# Altium PCB AT32.PcbDoc (part 8 of 9)
Units mm, origin at the board's own origin, x right, y up, seen from the top; angles counter-clockwise.
Board outline 152.1 x 84.6 mm, 2 copper layers (Top Layer, Bottom Layer); 49 components, 58 nets, 223 pads, 0 vias.
Unrouted connection lines stored in the file: 3.
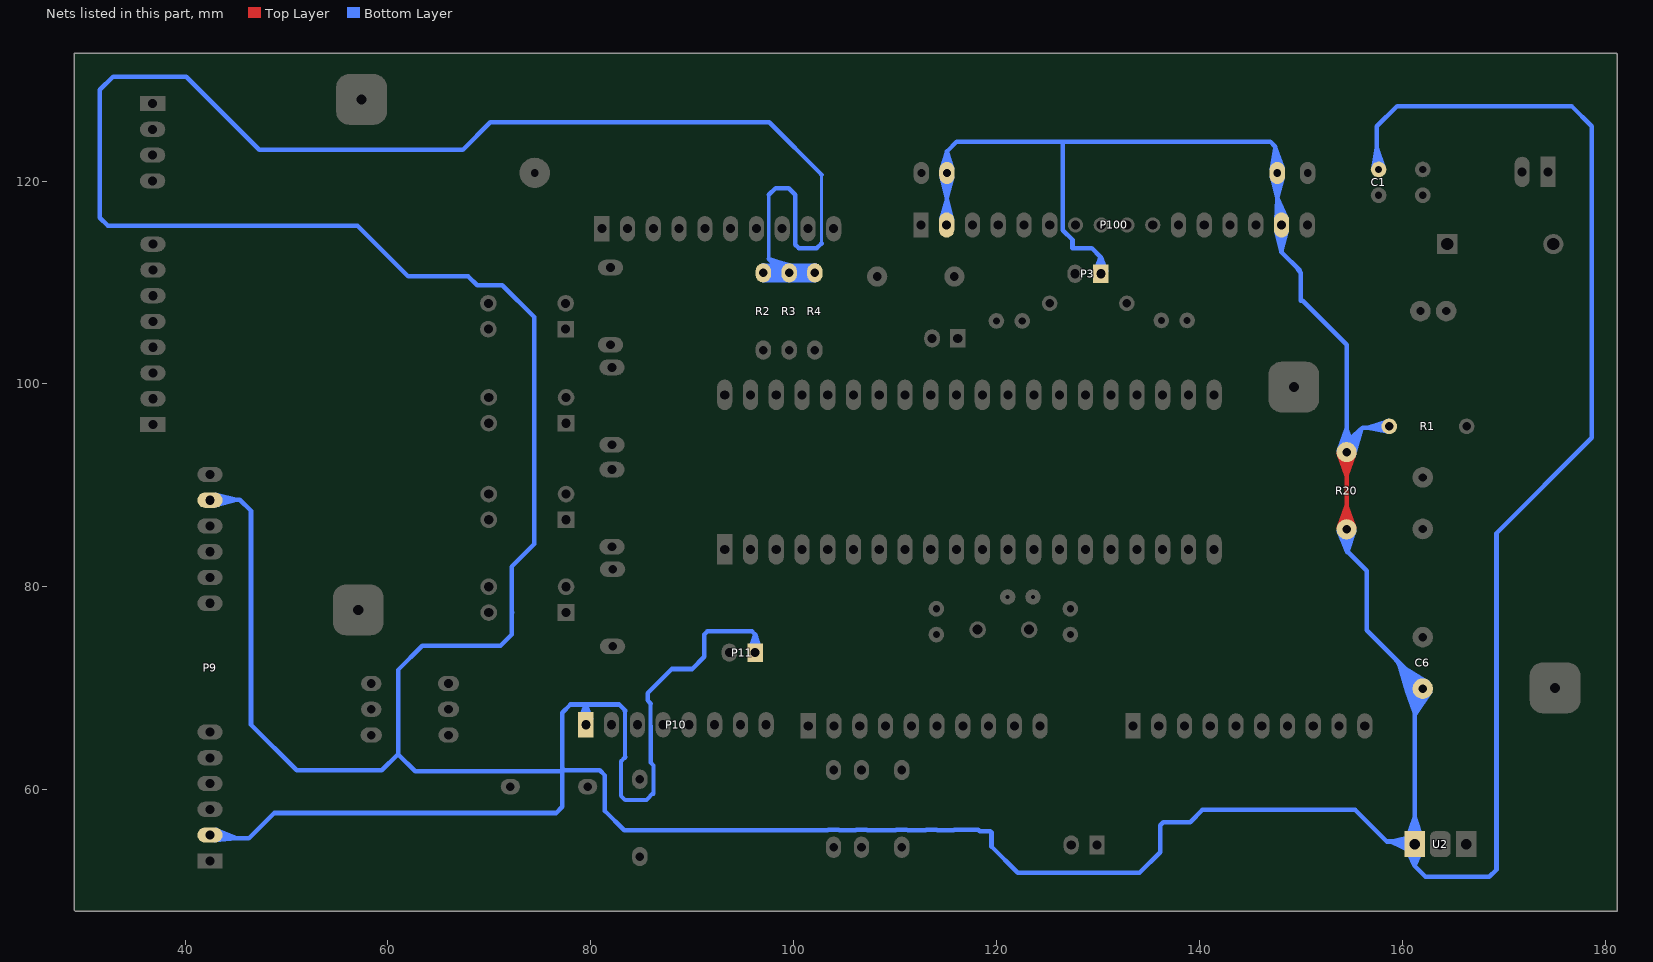
[diagram p8: the nets of this part, all layers, seen from the top]

## Nets (pads, with @x,y where several pads share a name; then routed paths per layer and width w, separated by ;. In a path a pad name is that pad's centre, name@x,y a point inside that pad or via, vN(x,y) a via of type N, cw(c..) or ccw(c..) an arc to the next point about the centre after c; other vN are vias at no path point) (continued)
VCC: C1.2 C6.1 P3.1 P9.2 P9.15 P10.1 P11.1 P100.2 P100.15 pad.1@147.697,120.8 pad.9 R1.2 R2.2 R3.2 R4.2 R20.1 R20.2 U2.3 | length 3156.3
  Top Layer w0.45: R20.1@153.971,86.213 ccw(c152.648,87.536) 154.519,87.536 ccw(c156.39,87.536) R20.1@155.067,86.213 ; R20.2@153.971,92.737 cw(c152.648,91.414) 154.519,91.414 cw(c156.39,91.414) R20.2@155.067,92.737 ; R20.1@154.519,85.579 R20.2@154.519,93.199 ; R20.1@153.755,85.793 154.519,88.015 ; R20.1@153.755,85.793 154.519,88.015 ; R20.1@153.755,85.793 154.519,88.015 ; R20.1@153.755,85.793 154.519,88.015 ; R20.1@153.755,85.793 154.519,88.015 ; R20.1@153.755,85.793 154.519,88.015 ; R20.1@153.755,85.793 154.519,88.015 ; R20.2@153.755,93.157 154.519,90.935 ; R20.2@153.755,93.157 154.519,90.935 ; R20.2@153.755,93.157 154.519,90.935 ; R20.2@153.755,93.157 154.519,90.935 ; R20.2@153.755,93.157 154.519,90.935 ; R20.2@153.755,93.157 154.519,90.935 ; R20.2@153.755,93.157 154.519,90.935 ; R20.1@154.195,85.687 154.519,88.015 ; R20.1@154.195,85.687 154.519,88.015 ; R20.1@154.195,85.687 154.519,88.015 ; R20.1@154.195,85.687 154.519,88.015 ; R20.1@154.195,85.687 154.519,88.015 ; R20.1@154.195,85.687 154.519,88.015 ; R20.1@154.195,85.687 154.519,88.015 ; R20.2@154.195,93.262 154.519,90.935 ; R20.2@154.195,93.262 154.519,90.935 ; R20.2@154.195,93.262 154.519,90.935 ; R20.2@154.195,93.262 154.519,90.935 ; R20.2@154.195,93.262 154.519,90.935 ; R20.2@154.195,93.262 154.519,90.935 ; R20.2@154.195,93.262 154.519,90.935 ; R20.1@154.519,85.665 154.519,88.015 ; R20.1@154.519,85.665 154.519,88.015 ; R20.1@154.519,85.665 154.519,88.015 ; R20.1@154.519,85.665 154.519,88.015 ; R20.1@154.519,85.665 154.519,88.015 ; R20.1@154.519,85.665 154.519,88.015 ; 154.519,88.015 R20.1@155.283,85.793 ; 154.519,88.015 R20.1@154.843,85.687 ; 154.519,88.015 R20.1@155.283,85.793 ; 154.519,88.015 R20.1@154.843,85.687 ; 154.519,88.015 R20.1@155.283,85.793 ; 154.519,88.015 R20.1@154.843,85.687 ; 154.519,88.015 R20.1@155.283,85.793 ; 154.519,88.015 R20.1@154.843,85.687 ; 154.519,88.015 R20.1@155.283,85.793 ; 154.519,88.015 R20.1@154.843,85.687 ; 154.519,88.015 R20.1@155.283,85.793 ; 154.519,88.015 R20.1@154.843,85.687 ; 154.519,88.015 R20.1@155.283,85.793 ; 154.519,88.015 R20.1@154.843,85.687 ; 154.519,90.935 R20.2@155.283,93.157 ; 154.519,90.935 R20.2@154.843,93.262 ; 154.519,90.935 R20.2@154.519,93.285 ; 154.519,90.935 R20.2@155.283,93.157 ; 154.519,90.935 R20.2@154.843,93.262 ; 154.519,90.935 R20.2@154.519,93.285 ; 154.519,90.935 R20.2@155.283,93.157 ; 154.519,90.935 R20.2@154.843,93.262 ; 154.519,90.935 R20.2@154.519,93.285 ; 154.519,90.935 R20.2@155.283,93.157 ; 154.519,90.935 R20.2@154.843,93.262 ; 154.519,90.935 R20.2@154.519,93.285 ; 154.519,90.935 R20.2@155.283,93.157 ; 154.519,90.935 R20.2@154.843,93.262 ; 154.519,90.935 R20.2@155.283,93.157 ; 154.519,90.935 R20.2@154.843,93.262 ; 154.519,90.935 R20.2@154.519,93.285 ; 154.519,90.935 R20.2@155.283,93.157 ; 154.519,90.935 R20.2@154.843,93.262 ; 154.519,90.935 R20.2@154.519,93.285
  Bottom Layer w0.33: 97.561,112.352 97.561,118.641 ; 102.751,113.851 102.751,120.649
  Bottom Layer w0.4: 83.37,63.13 83.37,67.713 ; 83.4,63.2 83,62.8 83,59.4 83.4,59 85.5,59 86.2,59.7 ; 85.91,68.51 85.91,66.299 85.915,66.294 85.915,62.685 86.2,62.4 86.2,59.6
  Bottom Layer w0.45: P9.15@42.6,88.6 45.4,88.6 46.5,87.5 46.5,66.4 51,61.9 59.4,61.9 61,63.5 ; P9.2@42.7,55.2 46.3,55.2 48.8,57.7 76.6,57.7 77.2,58.3 77.2,63.3 ; P9.2@43.013,55.573 ccw(c43.914,56.474) 43.914,55.2 ; P9.2@43.102,56.025 45.052,55.205 ; P9.2@43.331,55.891 ccw(c45,57.56) 45,55.2 ; P9.15@43.331,88.169 cw(c44.372,87.128) 44.372,88.6 ; P9.15@43.331,88.911 ccw(c44.083,89.663) 44.083,88.6 ; 72.233,77.471 72.251,77.489 ; 77.2,61.8 62.7,61.8 61,63.5 ; P10.1@79.144,67.277 ccw(c78.248,68.173) 79.515,68.173 ccw(c80.782,68.173) P10.1@79.886,67.277 ; P10.1@79.515,66.406 79.515,68.4 ; 83.37,67.713 83.375,67.718 83.375,67.825 82.8,68.4 79.515,68.4 ; 85.925,68.475 85.6,68.8 85.6,69.5 88,71.9 90,71.9 91.2,73.1 91.2,75.3 91.5,75.6 95.9,75.6 96.204,75.296 ; P11.1@95.819,74.027 ccw(c94.888,74.958) 96.204,74.958 ccw(c97.52,74.958) P11.1@96.589,74.027 ; P11.1@96.204,73.512 96.204,75.296 ; R2.2@96.954,110.236 R3.2@99.342,110.237 ; R2.2@96.955,110.235 R3.2@99.273,110.251 ; R2.2@96.965,111.68 R3.2@99.112,111.606 ; R2.2@96.985,110.233 R3.2@99.1,110.384 ; R2.2@96.989,110.233 R3.2@99.152,110.398 ; R2.2@97.007,110.232 R3.2@99.12,110.472 ; R2.2@97.016,110.357 R3.2@99.556,110.357 ; R2.2@97.021,111.682 R3.2@99.148,111.391 ; R2.2@97.034,111.502 R3.2@99.19,111.158 ; R2.2@97.046,111.681 R3.2@99.355,111.281 ; R2.2@97.05,111.681 R3.2@99.326,111.267 ; R2.2@97.06,110.234 R3.2@99.195,110.68 ; R2.2@97.076,110.415 R3.2@99.168,110.921 ; R2.2@97.083,110.844 ccw(c98.259,112.02) 98.259,110.357 ; R2.2@97.094,111.496 R3.2@99.168,110.921 ; R2.2@97.108,111.314 R3.2@99.195,110.68 ; R2.2@97.11,110.6 R3.2@99.326,111.267 ; R2.2@97.113,110.601 R3.2@99.355,111.281 ; R2.2@97.126,111.491 R3.2@99.406,110.742 ; R2.2@97.129,111.49 R3.2@99.355,110.739 ; R2.2@97.133,110.425 R3.2@99.19,111.158 ; R2.2@97.149,110.608 R3.2@99.148,111.391 ; R2.2@97.163,111.302 R3.2@99.12,110.472 ; R2.2@97.178,111.297 R3.2@99.152,110.398 ; R2.2@97.185,111.295 R3.2@99.1,110.384 ; R2.2@97.199,111.29 R3.2@99.342,110.237 ; R2.2@97.201,111.29 R3.2@99.273,110.251 ; R2.2@97.226,110.357 ccw(c97.226,113.107) R3.2@99.171,111.162 ; R2.2@97.401,111.162 ccw(c99.346,113.107) R3.2@99.346,110.357 ; 97.561,112.352 R3.2@99.556,110.357 ; 97.561,118.641 98.22,119.3 99.52,119.3 100.161,118.659 100.161,113.739 100.5,113.4 102.3,113.4 102.751,113.851 ; 97.951,111.962 ccw(c98.905,112.916) R3.2@99.369,111.649 ; 98.313,110.357 ccw(c98.313,112.02) R3.2@99.489,110.844 ; 98.45,111.463 ccw(c99.172,112.186) R3.2@99.523,111.226 ; R3.2@99.221,110.707 97.669,112.26 ; R3.2@99.365,111.287 R2.2@97.489,110.295 ; R3.2@99.37,111.289 R2.2@97.307,110.251 ; R3.2@99.375,110.623 R2.2@97.22,111.671 ; R3.2@99.375,111.291 R2.2@97.432,110.317 ; R3.2@99.387,111.295 R2.2@97.472,110.384 ; R3.2@99.394,111.297 R2.2@97.42,110.398 ; R3.2@99.411,110.612 R2.2@97.456,111.434 ; R3.2@99.417,111.304 R2.2@97.463,110.509 ; R3.2@99.42,110.609 R2.2@97.449,111.398 ; R3.2@99.424,111.306 R2.2@97.402,110.521 ; R3.2@99.434,111.488 R2.2@97.322,110.724 ; R3.2@99.436,111.489 97.442,110.76 99.536,110.412 R2.2@97.381,110.761 ; R3.2@99.44,111.489 R2.2@97.381,110.761 ; R3.2@99.441,110.424 R2.2@97.287,111.169 ; R3.2@99.443,111.49 R2.2@97.244,110.744 ; R3.2@99.444,111.49 R2.2@97.209,110.743 ; R3.2@99.444,111.49 R2.2@97.182,110.738 ; R3.2@99.449,110.423 R2.2@97.133,111.163 ; R3.2@99.456,110.601 R2.2@97.436,111.256 ; R3.2@99.458,111.313 R2.2@97.202,110.625 ; R3.2@99.463,111.314 R2.2@97.281,110.66 ; R3.2@99.464,110.6 R2.2@97.363,111.237 ; R3.2@99.466,110.6 R2.2@97.386,111.225 ; R3.2@99.478,110.418 R2.2@97.397,110.992 ; R3.2@99.484,111.497 R2.2@97.435,110.95 ; R3.2@99.488,110.416 R2.2@97.435,110.95 ; R3.2@99.494,110.236 R4.2@101.882,110.237 ; R3.2@99.495,110.235 R4.2@101.813,110.251 ; R3.2@99.496,111.499 R2.2@97.397,110.992 ; R3.2@99.505,111.68 R4.2@101.652,111.606 ; R3.2@99.509,111.68 R2.2@97.386,111.225 ; R3.2@99.513,111.68 R2.2@97.363,111.237 ; R3.2@99.516,111.681 R2.2@97.436,111.256 ; R3.2@99.519,110.233 R2.2@97.281,110.66 ; R3.2@99.525,110.233 R4.2@101.64,110.384 ; R3.2@99.526,111.681 R2.2@97.217,111.281 ; R3.2@99.528,111.681 R2.2@97.202,111.287 ; R3.2@99.534,110.412 R2.2@97.318,110.773 ; R3.2@99.538,111.502 R2.2@97.382,111.158 ; R3.2@99.538,111.502 R2.2@97.379,111.159 ; R3.2@99.542,110.412 R2.2@97.178,110.747 ; R3.2@99.546,110.412 R2.2@97.322,110.724 ; R3.2@99.547,110.232 R4.2@101.66,110.472 ; R3.2@99.552,110.232 R2.2@97.402,110.521 ; R3.2@99.553,111.682 R2.2@97.449,111.398 ; R3.2@99.555,110.232 R2.2@97.463,110.509 ; R3.2@99.561,111.682 R4.2@101.688,111.391 ; R3.2@99.562,111.682 R2.2@97.456,111.434 ; R3.2@99.574,111.502 R4.2@101.73,111.158 ; R3.2@99.583,110.233 R2.2@97.42,110.398 ; R3.2@99.586,111.681 R4.2@101.895,111.281 ; R3.2@99.587,110.233 R2.2@97.472,110.384 ; R3.2@99.59,111.681 R4.2@101.866,111.267 ; R3.2@99.6,110.234 R4.2@101.735,110.68 ; R3.2@99.607,111.68 R2.2@97.46,111.606 ; R3.2@99.608,111.68 R2.2@97.455,111.61 ; R3.2@99.611,110.235 R2.2@97.489,110.295 ; R3.2@99.611,111.679 R2.2@97.394,111.631 ; R3.2@99.613,110.235 R2.2@97.354,110.271 ; R3.2@99.616,110.415 R4.2@101.708,110.921 ; R3.2@99.616,111.679 R2.2@97.22,111.671 ; R3.2@99.618,110.236 R2.2@97.23,110.237 ; R3.2@99.618,110.236 R2.2@97.24,110.236 ; R3.2@99.623,110.844 ccw(c100.799,112.02) 100.799,110.357 ; R3.2@99.634,111.496 R4.2@101.708,110.921 ; R3.2@99.648,111.314 R4.2@101.735,110.68 ; R3.2@99.65,110.6 R4.2@101.866,111.267 ; R3.2@99.653,110.601 R4.2@101.895,111.281 ; R3.2@99.666,111.491 R4.2@101.946,110.742 ; R3.2@99.669,111.49 R4.2@101.895,110.739 ; R3.2@99.673,110.425 R4.2@101.73,111.158 ; R3.2@99.689,110.608 R4.2@101.688,111.391 ; R3.2@99.703,111.302 R4.2@101.66,110.472 ; R3.2@99.718,111.297 R4.2@101.692,110.398 ; R3.2@99.725,111.295 R4.2@101.64,110.384 ; R3.2@99.739,111.29 R4.2@101.882,110.237 ; R3.2@99.741,111.29 R4.2@101.813,110.251 ; R3.2@99.766,110.357 ccw(c99.766,113.107) R4.2@101.711,111.162 ; R3.2@99.774,111.636 97.669,112.26 ; R3.2@99.941,111.162 ccw(c101.886,113.107) R4.2@101.886,110.357 ; 100.853,110.357 ccw(c100.853,112.02) R4.2@102.029,110.844 ; R4.2@101.905,111.287 R3.2@100.029,110.295 ; R4.2@101.91,111.289 R3.2@99.847,110.251 ; R4.2@101.915,110.623 R3.2@99.76,111.671 ; R4.2@101.915,111.291 R3.2@99.972,110.317 ; R4.2@101.927,111.295 R3.2@100.012,110.384 ; R4.2@101.934,111.297 R3.2@99.96,110.398 ; R4.2@101.951,110.612 R3.2@99.996,111.434 ; R4.2@101.957,111.304 R3.2@100.003,110.509 ; R4.2@101.96,110.609 R3.2@99.989,111.398 ; R4.2@101.964,111.306 R3.2@99.942,110.521 ; R4.2@101.974,111.488 R3.2@99.862,110.724 ; R4.2@101.976,111.489 99.982,110.76 102.076,110.412 R3.2@99.921,110.761 ; R4.2@101.98,111.489 R3.2@99.921,110.761 ; R4.2@101.981,110.424 R3.2@99.827,111.169 ; R4.2@101.983,111.49 R3.2@99.784,110.744 ; R4.2@101.984,111.49 R3.2@99.749,110.743 ; R4.2@101.984,111.49 R3.2@99.722,110.738 ; R4.2@101.989,110.423 R3.2@99.673,111.163 ; R4.2@101.996,110.601 R3.2@99.976,111.256 ; R4.2@101.998,111.313 R3.2@99.742,110.625 ; R4.2@102.003,111.314 R3.2@99.821,110.66 ; R4.2@102.004,110.6 R3.2@99.903,111.237 ; R4.2@102.006,110.6 R3.2@99.926,111.225 ; R4.2@102.018,110.418 R3.2@99.937,110.992 ; R4.2@102.024,111.497 R3.2@99.975,110.95 ; R4.2@102.028,110.416 R3.2@99.975,110.95 ; R4.2@102.036,111.499 R3.2@99.937,110.992 ; R4.2@102.049,111.68 R3.2@99.926,111.225 ; R4.2@102.053,111.68 R3.2@99.903,111.237 ; R4.2@102.056,111.681 R3.2@99.976,111.256 ; R4.2@102.059,110.233 R3.2@99.821,110.66 ; R4.2@102.066,111.681 R3.2@99.757,111.281 ; R4.2@102.068,111.681 R3.2@99.742,111.287 ; R4.2@102.068,110.233 R3.2@99.742,110.625 ; R4.2@102.074,110.412 R3.2@99.858,110.773 ; R4.2@102.078,111.502 R3.2@99.922,111.158 ; R4.2@102.078,111.502 R3.2@99.919,111.159 ; R4.2@102.082,110.412 R3.2@99.718,110.747 ; R4.2@102.086,110.412 R3.2@99.862,110.724 ; R4.2@102.092,110.232 R3.2@99.942,110.521 ; R4.2@102.093,111.682 R3.2@99.989,111.398 ; R4.2@102.095,110.232 R3.2@100.003,110.509 ; R4.2@102.096,110.357 R3.2@99.556,110.357 ; R4.2@102.102,111.682 R3.2@99.996,111.434 ; R4.2@102.123,110.233 R3.2@99.96,110.398 ; R4.2@102.127,110.233 R3.2@100.012,110.384 ; R4.2@102.147,111.68 R3.2@100,111.606 ; R4.2@102.148,111.68 R3.2@99.995,111.61 ; R4.2@102.151,110.235 R3.2@100.029,110.295 ; R4.2@102.151,111.679 R3.2@99.934,111.631 ; R4.2@102.153,110.235 R3.2@99.894,110.271 ; R4.2@102.156,111.679 R3.2@99.76,111.671 ; R4.2@102.158,110.236 R3.2@99.77,110.237 ; R4.2@102.158,110.236 R3.2@99.78,110.236 ; 102.751,120.649 97.6,125.8 70.1,125.8 67.4,123.1 47.3,123.1 40.1,130.3 32.9,130.3 31.6,129 31.6,116.4 32.4,115.6 57,115.6 62,110.6 67.931,110.6 68.792,109.74 71.28,109.74 74.42,106.6 74.42,84.22 72.2,82 72.2,75.3 71.1,74.2 63.4,74.2 61,71.8 61,63.5 ; P100.2@114.721,116.547 ccw(c113.757,117.511) 115.12,117.511 ; pad.9@114.74,120.082 cw(c113.824,119.166) 115.12,119.166 cw(c116.416,119.166) pad.9@115.5,120.082 ; pad.9@114.74,121.518 ccw(c113.824,122.434) 115.12,122.434 ccw(c116.416,122.434) pad.9@115.5,121.518 ; pad.9@115,120.8 115.12,120.92 115.12,122.92 ; 115.12,117.376 ccw(c116.292,117.376) P100.2@115.463,116.547 ; pad.9@115.12,120.8 115.12,115.68 P100.2@115.2,115.6 ; 126.547,123.9 126.547,115.16 127.5,114.207 127.5,113.4 129.4,113.4 130.29,112.51 ; P3.1@129.905,111.38 ccw(c128.974,112.311) 130.29,112.311 ccw(c131.606,112.311) P3.1@130.675,111.38 ; P3.1@130.29,110.865 130.29,112.51 ; pad.1@147.161,121.156 147.501,123.246 ; pad.1@147.318,120.082 cw(c146.401,119.166) 147.697,119.166 cw(c148.994,119.166) pad.1@148.077,120.082 ; pad.1@147.318,121.518 ccw(c146.878,121.958) 147.5,121.958 ; 147.5,122.911 ccw(c149.47,122.911) pad.1@148.077,121.518 ; P100.15@147.588,116.14 147.706,118.262 ; P100.15@147.697,115.439 147.697,120.303 147.5,120.5 147.5,123.4 147,123.9 116.1,123.9 115.12,122.92 ; 147.697,117.358 ccw(c149.294,117.358) P100.15@148.165,116.229 ; 147.697,118.444 ccw(c150.38,118.444) P100.15@148.483,116.547 ; P100.15@147.741,114.805 cw(c146.874,113.938) 148.1,113.938 ; 148.1,113.88 cw(c149.408,113.88) P100.15@148.483,114.805 ; P100.15@148.1,115.8 148.1,113 149.9,111.2 ; pad.1@148.221,121.255 147.501,123.246 ; P100.15@148.611,116.339 147.706,118.262 ; 149.694,111.304 150.019,110.979 150.019,108.185 ; 150.2,108.2 154.519,103.881 R20.2@154.519,93.285 ; R20.2@153.931,93.79 155.873,95.456 ; R20.2@153.932,93.791 155.947,95.538 ; R20.2@153.935,93.794 155.872,95.426 ; R20.2@153.937,93.797 155.898,95.44 ; R20.1@153.971,85.117 cw(c152.51,83.656) 154.576,83.656 ; R20.2@153.971,93.833 ccw(c152.648,95.156) 154.519,95.156 ccw(c156.39,95.156) R20.2@155.067,93.833 ; R20.2@154.255,93.474 155.873,95.456 ; R20.2@154.257,93.477 155.898,95.44 ; R20.2@154.395,93.271 cw(c155.739,93.425) 154.782,94.382 ; 154.576,83.932 cw(c156.252,83.932) R20.1@155.067,85.117 ; R20.1@154.576,85.473 154.576,83.409 ; 154.7,83.4 156.5,81.6 156.5,75.7 161.228,70.972 C6.1@161.228,69.956 ; R20.2@154.803,93.127 155.898,95.44 ; R20.2@154.805,93.131 155.873,95.456 ; R20.2@154.842,93.322 cw(c156.921,93.561) 155.441,95.041 ; R20.2@155.227,92.969 155.947,95.538 ; R20.2@155.228,92.972 155.941,95.542 ; R20.2@155.23,92.976 155.872,95.426 ; R20.2@155.231,92.979 155.873,95.456 ; R20.2@155.289,93.374 cw(c158.103,93.697) 156.1,95.7 ; 157.136,95.7 ccw(c157.136,97.408) R1.2@158.344,96.2 ; C1.2@157.287,121.531 ccw(c156.772,122.046) 157.5,122.046 ; C1.2@157.5,121.2 157.5,125.4 159.5,127.4 176.7,127.4 178.7,125.4 178.7,94.7 169.3,85.3 169.3,52.1 168.6,51.4 162.3,51.4 161.228,52.472 ; 157.5,122.877 ccw(c159.403,122.877) C1.2@158.057,121.531 ; 157.691,95.7 cw(c157.691,94.777) R1.2@158.344,95.43 ; C1.2@158.205,121.259 157.501,123.262 C1.2@157.128,121.172 ; R1.2@158.63,96.351 156.611,95.7 R1.2@158.688,95.272 ; R1.2@158.8,95.7 156.1,95.7 ; 159.159,73.041 cw(c156.075,69.956) 160.437,69.956 ; 159.306,54.891 cw(c159.306,52.964) U2.3@160.669,54.327 ; 159.33,54.891 ccw(c159.33,56.784) 160.669,55.445 ccw(c159.318,56.796) 161.228,56.796 ccw(c163.138,56.796) U2.3@161.787,55.445 ; 159.927,72.273 cw(c157.611,69.956) 160.887,69.956 ; 160.448,69.824 161.228,67.59 ; 160.503,69.64 159.682,72.518 ; U2.3@160.669,53.818 cw(c159.327,52.472) 161.228,52.472 ; 160.669,69.397 cw(c159.318,68.046) 161.228,68.046 cw(c163.138,68.046) C6.1@161.787,69.397 ; 160.696,71.504 cw(c159.147,69.956) C6.1@161.337,69.956 ; 160.926,69.797 159.682,72.518 ; U2.3@161.16,54.891 158.485,54.891 155.376,58 140.3,58 139.1,56.8 136.429,56.8 136.139,56.51 136.139,53.839 134.1,51.8 122.1,51.8 119.509,54.391 119.509,55.8 119.396,55.913 118.364,55.913 118.214,56.063 115.824,56.063 115.761,56 114.171,56 114.116,56.055 113.084,56.055 113.029,56 111.239,56 111.176,56.063 110.144,56.063 110.081,56 107.267,56 107.204,56.063 106.172,56.063 106.109,56 104.519,56 104.456,56.063 103.424,56.063 103.361,56 83.3,56 81.4,57.9 81.4,61.4 80.9,61.9 77.4,61.9 77.18,62.12 77.18,67.58 78,68.4 79.515,68.4 ; U2.3@161.181,55.422 158.87,54.889 ; U2.3@161.237,54.738 161.228,54.747 C6.1@161.228,69.956 ; C6.1@161.246,70.076 161.228,67.345 ; C6.1@161.247,70.083 161.253,67.661 ; C6.1@161.366,69.523 160.21,72.013 ; C6.1@161.384,69.497 160.123,71.947 ; C6.1@161.396,69.48 160.001,71.989 ; C6.1@161.402,69.473 159.871,72.105 ; C6.1@161.509,70.149 159.682,72.518 ; C6.1@161.568,69.931 161.228,67.59 ; C6.1@161.696,70.035 161.228,67.345 ; C6.1@161.698,70.042 161.253,67.661 ; C6.1@161.698,70.043 161.228,67.59 ; C6.1@161.698,70.043 161.231,67.608 ; C6.1@161.738,70.692 160.888,69.931 ; C6.1@161.759,69.747 160.21,72.013 ; C6.1@161.768,69.736 160.123,71.947 ; C6.1@161.77,69.208 160.888,69.931 ; C6.1@161.773,69.73 160.001,71.989 ; C6.1@161.774,69.728 159.871,72.105 ; U2.3@161.787,53.818 ccw(c163.129,52.472) 161.228,52.472 ; C6.1@161.845,70.451 159.682,72.518 ; C6.1@161.97,70.292 160.888,69.931 ; C6.1@161.984,69.618 160.888,69.931 ; C6.1@162.008,69.824 161.228,67.59 ; C6.1@162.259,70.207 160.123,71.947 ; C6.1@162.269,70.197 160.21,72.013 ; C6.1@162.347,69.836 161.228,67.345 ; C6.1@162.506,70.586 160.001,71.989 ; C6.1@162.509,70.584 159.871,72.105 ; C6.1@162.515,70.579 160.123,71.947 ; C6.1@162.539,70.56 160.21,72.013 ; C6.1@162.726,69.584 161.253,67.661 ; C6.1@162.727,69.585 161.231,67.608 ; C6.1@162.728,69.587 161.228,67.59 ; C6.1@162.743,69.617 161.228,67.345 ; P9.2@42.946,54.995 45.083,55.2 ; P9.2@42.946,54.995 45.083,55.2 ; P9.2@42.946,54.995 45.083,55.2 ; P9.2@42.947,54.995 45.052,55.205 ; P9.2@42.946,54.995 45.083,55.2 ; P9.2@42.96,55.52 45.083,55.2 ; P9.2@42.96,55.52 45.083,55.2 ; P9.2@42.96,55.52 45.083,55.2 ; P9.2@42.96,55.52 45.052,55.205 ; P9.2@42.96,55.52 45.083,55.2 ; P9.15@42.96,88.54 45.061,88.6 ; P9.15@42.96,88.54 45.061,88.6 ; P9.15@42.96,88.54 45.061,88.6 ; P9.15@42.96,88.54 45.061,88.6 ; P9.15@42.96,88.54 45.06,88.6 ; P9.15@43.011,89.063 45.061,88.6 ; P9.15@43.011,89.063 45.061,88.6 ; P9.15@43.011,89.063 45.061,88.6 ; P9.15@43.011,89.063 45.061,88.6 ; P9.15@43.011,89.063 45.06,88.6 ; P9.15@43.04,88.021 45.061,88.6 ; P9.15@43.04,88.021 45.061,88.6 ; P9.15@43.04,88.021 45.061,88.6 ; P9.15@43.04,88.021 45.061,88.6 ; P9.15@43.04,88.021 45.06,88.6 ; P9.2@43.101,56.026 45.083,55.2 ; P9.2@43.101,56.026 45.083,55.2 ; P9.2@43.101,56.026 45.083,55.2 ; P9.2@43.101,56.026 45.083,55.2 ; P10.1@78.998,66.998 79.515,68.4 ; P10.1@78.998,66.998 79.515,68.4 ; P10.1@78.998,66.998 79.515,68.4 ; P10.1@78.998,66.998 79.515,68.4 ; P10.1@78.998,66.998 79.515,68.4 ; P10.1@79.515,66.906 79.515,68.4 ; P10.1@79.515,66.906 79.515,68.4 ; P10.1@79.515,66.906 79.515,68.4 ; P10.1@79.515,66.906 79.515,68.4 ; P10.1@79.515,66.906 79.515,68.4 ; 79.515,68.4 P10.1@80.032,66.998 ; 79.515,68.4 P10.1@80.032,66.998 ; 79.515,68.4 P10.1@80.032,66.998 ; 79.515,68.4 P10.1@80.032,66.998 ; 79.515,68.4 P10.1@80.032,66.998 ; P11.1@95.666,73.732 96.204,75.296 ; P11.1@95.666,73.732 96.204,75.296 ; P11.1@95.666,73.732 96.204,75.296 ; P11.1@95.666,73.732 96.204,75.296 ; P11.1@95.666,73.732 96.204,75.296 ; P11.1@96.204,73.642 96.204,75.296 ; P11.1@96.204,73.642 96.204,75.296 ; P11.1@96.204,73.642 96.204,75.296 ; P11.1@96.204,73.642 96.204,75.296 ; P11.1@96.204,73.642 96.204,75.296 ; 96.204,75.296 P11.1@96.742,73.732 ; 96.204,75.296 P11.1@96.742,73.732 ; 96.204,75.296 P11.1@96.742,73.732 ; 96.204,75.296 P11.1@96.742,73.732 ; 96.204,75.296 P11.1@96.742,73.732 ; R2.2@96.98,110.233 R3.2@99.242,110.357 ; R2.2@96.98,110.233 R3.2@99.242,110.357 ; R2.2@96.98,110.233 R3.2@99.242,110.357 ; R2.2@97.016,110.777 R3.2@99.242,110.357 ; R2.2@97.016,110.777 R3.2@99.242,110.357 ; R2.2@97.016,110.777 R3.2@99.242,110.357 ; R2.2@97.016,110.777 R3.2@99.1,110.384 ; R2.2@97.016,110.777 R3.2@99.273,110.251 ; R2.2@97.016,110.777 R3.2@99.342,110.237 ; R2.2@97.016,110.777 R3.2@99.12,110.472 ; R2.2@97.016,110.777 R3.2@99.152,110.398 ; R2.2@97.016,110.777 R3.2@99.195,110.68 ; R2.2@97.016,110.957 R3.2@99.355,110.739 ; R2.2@97.016,110.957 R3.2@99.406,110.742 ; R2.2@97.016,110.957 R3.2@99.168,110.921 ; R2.2@97.016,110.957 R3.2@99.19,111.158 ; R2.2@97.016,111.137 R3.2@99.326,111.267 ; R2.2@97.016,111.137 R3.2@99.355,111.281 ; R2.2@97.016,111.137 R3.2@99.148,111.391 ; R2.2@97.016,111.137 R3.2@99.112,111.606 ; R2.2@97.133,111.163 99.541,111.502 R2.2@97.287,111.169 ; R2.2@97.133,111.163 R3.2@99.556,110.957 ; R2.2@97.166,110.742 R3.2@99.543,110.412 ; R2.2@97.166,110.742 R3.2@99.446,111.491 ; R2.2@97.166,110.742 R3.2@99.556,110.957 ; R2.2@97.178,110.747 R3.2@99.446,111.491 ; R2.2@97.178,110.747 R3.2@99.556,110.957 ; R2.2@97.181,111.297 R3.2@99.242,110.357 ; R2.2@97.181,111.297 R3.2@99.242,110.357 ; R2.2@97.181,111.297 R3.2@99.242,110.357 ; R2.2@97.182,110.738 R3.2@99.544,110.412 ; R2.2@97.182,110.738 R3.2@99.556,110.957 ; R2.2@97.202,110.625 R3.2@99.112,111.606 ; R2.2@97.202,110.625 99.528,110.233 R4.2@101.692,110.398 ; R2.2@97.202,110.625 R3.2@99.556,110.777 ; R2.2@97.202,111.287 99.459,110.601 R2.2@97.217,111.281 ; R2.2@97.202,111.287 R3.2@99.556,111.137 ; R2.2@97.209,110.743 R3.2@99.542,110.412 ; R2.2@97.209,110.743 R3.2@99.556,110.957 ; R2.2@97.217,110.739 R3.2@99.543,110.412 ; R2.2@97.217,110.739 R3.2@99.443,111.49 ; R2.2@97.217,110.739 R3.2@99.556,110.957 ; R2.2@97.217,110.739 R3.2@99.543,110.412 ; R2.2@97.217,110.739 R3.2@99.443,111.49 ; R2.2@97.217,110.739 R3.2@99.556,110.957 ; R2.2@97.217,110.739 R3.2@99.543,110.412 ; R2.2@97.217,110.739 R3.2@99.443,111.49 ; R2.2@97.217,110.739 R3.2@99.556,110.957 ; R2.2@97.217,110.739 R3.2@99.543,110.412 ; R2.2@97.217,110.739 R3.2@99.443,111.49 ; R2.2@97.217,110.739 R3.2@99.556,110.957 ; R2.2@97.217,111.281 R3.2@99.556,111.137 ; R2.2@97.22,111.671 R3.2@99.556,111.137 ; R2.2@97.23,110.237 R3.2@99.373,111.29 ; R2.2@97.23,110.237 R3.2@99.556,110.777 ; R2.2@97.229,111.274 99.461,110.6 R2.2@97.235,111.273 ; R2.2@97.229,111.274 99.524,111.681 R2.2@97.235,111.273 ; R2.2@97.229,111.274 R3.2@99.556,111.137 ; R2.2@97.235,111.273 R3.2@99.556,111.137 ; R2.2@97.24,110.236 R3.2@99.372,111.29 ; R2.2@97.24,110.236 R3.2@99.556,110.777 ; R2.2@97.244,110.744 R3.2@99.542,110.412 ; R2.2@97.244,110.744 R3.2@99.556,110.957 ; R2.2@97.246,111.267 R3.2@99.462,110.6 ; R2.2@97.246,111.267 R3.2@99.522,111.681 ; R2.2@97.246,111.267 R3.2@99.556,111.137 ; R2.2@97.246,111.267 R3.2@99.462,110.6 ; R2.2@97.246,111.267 R3.2@99.522,111.681 ; R2.2@97.246,111.267 R3.2@99.556,111.137 ; R2.2@97.246,111.267 R3.2@99.462,110.6 ; R2.2@97.246,111.267 R3.2@99.522,111.681 ; R2.2@97.246,111.267 R3.2@99.556,111.137 ; R2.2@97.246,111.267 R3.2@99.462,110.6 ; R2.2@97.246,111.267 R3.2@99.522,111.681 ; R2.2@97.246,111.267 R3.2@99.556,111.137 ; R2.2@97.247,111.267 R3.2@99.461,110.6 ; R2.2@97.247,111.267 R3.2@99.522,111.681 ; R2.2@97.247,111.267 R3.2@99.556,111.137 ; R2.2@97.248,111.266 R3.2@99.462,110.6 ; R2.2@97.248,111.266 R3.2@99.522,111.681 ; R2.2@97.248,111.266 R3.2@99.556,111.137 ; R2.2@97.28,110.254 99.615,110.235 R2.2@97.307,110.257 ; R2.2@97.28,110.254 R3.2@99.373,111.29 ; R2.2@97.28,110.254 R3.2@99.556,110.777 ; R2.2@97.281,110.66 R3.2@99.556,110.777 ; R2.2@97.287,111.169 R3.2@99.556,110.957 ; R2.2@97.299,110.251 R3.2@99.616,110.235 ; R2.2@97.299,110.251 R3.2@99.371,111.29 ; R2.2@97.299,110.251 R3.2@99.556,110.777 ; R2.2@97.299,110.251 R3.2@99.616,110.235 ; R2.2@97.299,110.251 R3.2@99.371,111.29 ; R2.2@97.299,110.251 R3.2@99.556,110.777 ; R2.2@97.299,110.251 R3.2@99.616,110.235 ; R2.2@97.299,110.251 R3.2@99.371,111.29 ; R2.2@97.299,110.251 R3.2@99.556,110.777 ; R2.2@97.299,110.251 R3.2@99.616,110.235 ; R2.2@97.299,110.251 R3.2@99.371,111.29 ; R2.2@97.299,110.251 R3.2@99.556,110.777 ; R2.2@97.307,110.257 R3.2@99.371,111.29 ; R2.2@97.307,110.257 R3.2@99.556,110.777 ; R2.2@97.307,110.251 R3.2@99.617,110.235 ; R2.2@97.307,110.251 R3.2@99.556,110.777 ; R2.2@97.318,110.773 R3.2@99.446,111.491 ; R2.2@97.318,110.773 R3.2@99.556,110.957 ; R2.2@97.322,110.724 R3.2@99.556,110.957 ; R2.2@97.33,110.357 R3.2@99.592,110.233 ; R2.2@97.33,110.357 R3.2@99.391,111.297 ; R2.2@97.33,110.357 R3.2@99.556,110.777 ; R2.2@97.33,110.357 R3.2@99.592,110.233 ; R2.2@97.33,110.357 R3.2@99.391,111.297 ; R2.2@97.33,110.357 R3.2@99.556,110.777 ; R2.2@97.33,110.357 R3.2@99.592,110.233 ; R2.2@97.33,110.357 R3.2@99.391,111.297 ; R2.2@97.33,110.357 R3.2@99.556,110.777 ; R2.2@97.354,110.271 R3.2@99.371,111.29 ; R2.2@97.354,110.271 R3.2@99.556,110.777 ; R2.2@97.363,111.237 R3.2@99.556,111.137 ; R2.2@97.377,110.68 99.512,110.234 R2.2@97.377,110.681 ; R2.2@97.377,110.68 99.464,111.314 R2.2@97.377,110.681 ; R2.2@97.377,110.68 R3.2@99.556,110.777 ; R2.2@97.377,110.681 R3.2@99.556,110.777 ; R2.2@97.379,111.159 99.438,110.425 R2.2@97.382,111.158 ; R2.2@97.379,111.159 R3.2@99.556,110.957 ; R2.2@97.381,110.761 R3.2@99.556,110.957 ; R2.2@97.382,111.158 R3.2@99.556,110.957 ; R2.2@97.386,111.225 R3.2@99.556,111.137 ; R2.2@97.394,111.631 R3.2@99.37,110.625 ; R2.2@97.394,111.631 R3.2@99.556,111.137 ; R2.2@97.397,110.992 R3.2@99.556,110.957 ; R2.2@97.402,110.521 R3.2@99.556,110.777 ; R2.2@97.404,110.921 99.496,110.415 R2.2@97.408,110.922 ; R2.2@97.404,110.921 99.478,111.496 R2.2@97.408,110.922 ; R2.2@97.404,110.921 R3.2@99.556,110.957 ; R2.2@97.408,110.922 R3.2@99.556,110.957 ; R2.2@97.42,110.398 R3.2@99.556,110.777 ; R2.2@97.424,111.391 99.423,110.608 R2.2@97.43,111.391 ; R2.2@97.424,111.391 99.551,111.682 R2.2@97.43,111.391 ; R2.2@97.424,111.391 R3.2@99.556,111.137 ; R2.2@97.43,111.391 R3.2@99.556,111.137 ; R2.2@97.432,110.317 99.604,110.234 R2.2@97.47,110.32 ; R2.2@97.432,110.317 R3.2@99.556,110.777 ; R2.2@97.435,110.95 R3.2@99.556,110.957 ; R2.2@97.436,111.256 R3.2@99.556,111.137 ; R2.2@97.449,111.398 R3.2@99.556,111.137 ; R2.2@97.453,110.471 99.565,110.232 R2.2@97.452,110.472 ; R2.2@97.453,110.471 99.409,111.302 R2.2@97.452,110.472 ; R2.2@97.453,110.471 R3.2@99.556,110.777 ; R2.2@97.452,110.472 R3.2@99.556,110.777 ; R2.2@97.455,111.61 R3.2@99.37,110.625 ; R2.2@97.455,111.61 R3.2@99.556,111.137 ; R2.2@97.456,111.434 R3.2@99.556,111.137 ; R2.2@97.46,111.606 R3.2@99.37,110.625 ; R2.2@97.46,111.606 R3.2@99.556,111.137 ; R2.2@97.463,110.509 R3.2@99.556,110.777 ; R2.2@97.47,110.32 R3.2@99.372,111.29 ; R2.2@97.47,110.32 R3.2@99.556,110.777 ; R2.2@97.472,110.384 R3.2@99.556,110.777 ; R2.2@97.489,110.295 R3.2@99.556,110.777 ; 97.63,112.283 R3.2@99.222,110.706 ; 97.63,112.283 R3.2@99.776,111.636 ; 97.63,112.283 R3.2@99.556,111.137 ; 97.63,112.283 R3.2@99.222,110.706 ; 97.63,112.283 R3.2@99.776,111.636 ; 97.63,112.283 R3.2@99.556,111.137 ; 97.63,112.283 R3.2@99.222,110.706 ; 97.63,112.283 R3.2@99.776,111.636 ; 97.63,112.283 R3.2@99.556,111.137 ; 97.63,112.283 R3.2@99.222,110.706 ; 97.63,112.283 R3.2@99.776,111.636 ; 97.63,112.283 R3.2@99.556,111.137 ; 97.669,112.26 R3.2@99.556,111.137 ; R3.2@99.355,110.739 97.029,110.412 R3.2@99.406,110.742 ; R3.2@99.52,110.233 R4.2@101.782,110.357 ; R3.2@99.52,110.233 R4.2@101.782,110.357 ; R3.2@99.52,110.233 R4.2@101.782,110.357 ; R3.2@99.556,110.777 R4.2@101.782,110.357 ; R3.2@99.556,110.777 R4.2@101.782,110.357 ; R3.2@99.556,110.777 R4.2@101.782,110.357 ; R3.2@99.556,110.777 R4.2@101.64,110.384 ; R3.2@99.556,110.777 R4.2@101.813,110.251 ; R3.2@99.556,110.777 R4.2@101.882,110.237 ; R3.2@99.556,110.777 R4.2@101.66,110.472 ; R3.2@99.556,110.777 R4.2@101.692,110.398 ; R3.2@99.556,110.777 R4.2@101.735,110.68 ; R3.2@99.556,110.957 R4.2@101.895,110.739 ; R3.2@99.556,110.957 R4.2@101.946,110.742 ; R3.2@99.556,110.957 R4.2@101.708,110.921 ; R3.2@99.556,110.957 R4.2@101.73,111.158 ; R3.2@99.556,111.137 R4.2@101.866,111.267 ; R3.2@99.556,111.137 R4.2@101.895,111.281 ; R3.2@99.556,111.137 R4.2@101.688,111.391 ; R3.2@99.556,111.137 R4.2@101.652,111.606 ; R3.2@99.673,111.163 102.081,111.502 R3.2@99.827,111.169 ; R3.2@99.673,111.163 R4.2@102.096,110.957 ; R3.2@99.706,110.742 R4.2@102.083,110.412 ; R3.2@99.706,110.742 R4.2@101.986,111.491 ; R3.2@99.706,110.742 R4.2@102.096,110.957 ; R3.2@99.718,110.747 R4.2@101.986,111.491 ; R3.2@99.718,110.747 R4.2@102.096,110.957 ; R3.2@99.721,111.297 R4.2@101.782,110.357 ; R3.2@99.721,111.297 R4.2@101.782,110.357 ; R3.2@99.721,111.297 R4.2@101.782,110.357 ; R3.2@99.722,110.738 R4.2@102.084,110.412 ; R3.2@99.722,110.738 R4.2@102.096,110.957 ; R3.2@99.742,110.625 R4.2@101.652,111.606 ; R3.2@99.742,110.625 R4.2@102.096,110.777 ; R3.2@99.742,111.287 101.999,110.601 R3.2@99.757,111.281 ; R3.2@99.742,111.287 R4.2@102.096,111.137 ; R3.2@99.749,110.743 R4.2@102.082,110.412 ; R3.2@99.749,110.743 R4.2@102.096,110.957 ; R3.2@99.757,110.739 R4.2@102.083,110.412 ; R3.2@99.757,110.739 R4.2@101.983,111.49 ; R3.2@99.757,110.739 R4.2@102.096,110.957 ; R3.2@99.757,110.739 R4.2@102.083,110.412 ; R3.2@99.757,110.739 R4.2@101.983,111.49 ; R3.2@99.757,110.739 R4.2@102.096,110.957 ; R3.2@99.757,110.739 R4.2@102.083,110.412 ; R3.2@99.757,110.739 R4.2@101.983,111.49 ; R3.2@99.757,110.739 R4.2@102.096,110.957 ; R3.2@99.757,110.739 R4.2@102.083,110.412 ; R3.2@99.757,110.739 R4.2@101.983,111.49 ; R3.2@99.757,110.739 R4.2@102.096,110.957 ; R3.2@99.757,111.281 R4.2@102.096,111.137 ; R3.2@99.76,111.671 R4.2@102.096,111.137 ; R3.2@99.77,110.237 R4.2@101.913,111.29 ; R3.2@99.77,110.237 R4.2@102.096,110.777 ; R3.2@99.769,111.274 102.001,110.6 R3.2@99.775,111.273 ; R3.2@99.769,111.274 102.064,111.681 R3.2@99.775,111.273 ; R3.2@99.769,111.274 R4.2@102.096,111.137 ; R3.2@99.775,111.273 R4.2@102.096,111.137 ; R3.2@99.78,110.236 R4.2@101.912,111.29 ; R3.2@99.78,110.236 R4.2@102.096,110.777 ; R3.2@99.784,110.744 R4.2@102.082,110.412 ; R3.2@99.784,110.744 R4.2@102.096,110.957 ; R3.2@99.786,111.267 R4.2@102.002,110.6 ; R3.2@99.786,111.267 R4.2@102.062,111.681 ; R3.2@99.786,111.267 R4.2@102.096,111.137 ; R3.2@99.786,111.267 R4.2@102.002,110.6 ; R3.2@99.786,111.267 R4.2@102.062,111.681 ; R3.2@99.786,111.267 R4.2@102.096,111.137 ; R3.2@99.786,111.267 R4.2@102.002,110.6 ; R3.2@99.786,111.267 R4.2@102.062,111.681 ; R3.2@99.786,111.267 R4.2@102.096,111.137 ; R3.2@99.786,111.267 R4.2@102.002,110.6 ; R3.2@99.786,111.267 R4.2@102.062,111.681 ; R3.2@99.786,111.267 R4.2@102.096,111.137 ; R3.2@99.787,111.267 R4.2@102.001,110.6 ; R3.2@99.787,111.267 R4.2@102.062,111.681 ; R3.2@99.787,111.267 R4.2@102.096,111.137 ; R3.2@99.788,111.266 R4.2@102.002,110.6 ; R3.2@99.788,111.266 R4.2@102.062,111.681 ; R3.2@99.788,111.266 R4.2@102.096,111.137 ; R3.2@99.82,110.254 102.155,110.235 R3.2@99.847,110.257 ; R3.2@99.82,110.254 R4.2@101.913,111.29 ; R3.2@99.82,110.254 R4.2@102.096,110.777 ; R3.2@99.821,110.66 R4.2@102.096,110.777 ; R3.2@99.827,111.169 R4.2@102.096,110.957 ; R3.2@99.839,110.251 R4.2@102.156,110.235 ; R3.2@99.839,110.251 R4.2@101.911,111.29 ; R3.2@99.839,110.251 R4.2@102.096,110.777 ; R3.2@99.839,110.251 R4.2@102.156,110.235 ; R3.2@99.839,110.251 R4.2@101.911,111.29 ; R3.2@99.839,110.251 R4.2@102.096,110.777 ; R3.2@99.839,110.251 R4.2@102.156,110.235 ; R3.2@99.839,110.251 R4.2@101.911,111.29 ; R3.2@99.839,110.251 R4.2@102.096,110.777 ; R3.2@99.839,110.251 R4.2@102.156,110.235 ; R3.2@99.839,110.251 R4.2@101.911,111.29 ; R3.2@99.839,110.251 R4.2@102.096,110.777 ; R3.2@99.847,110.257 R4.2@101.911,111.29 ; R3.2@99.847,110.257 R4.2@102.096,110.777 ; R3.2@99.847,110.251 R4.2@102.157,110.235 ; R3.2@99.847,110.251 R4.2@102.096,110.777 ; R3.2@99.858,110.773 R4.2@101.986,111.491 ; R3.2@99.858,110.773 R4.2@102.096,110.957 ; R3.2@99.862,110.724 R4.2@102.096,110.957 ; R3.2@99.87,110.357 R4.2@102.132,110.233 ; R3.2@99.87,110.357 R4.2@101.931,111.297 ; R3.2@99.87,110.357 R4.2@102.096,110.777 ; R3.2@99.87,110.357 R4.2@102.132,110.233 ; R3.2@99.87,110.357 R4.2@101.931,111.297 ; R3.2@99.87,110.357 R4.2@102.096,110.777 ; R3.2@99.87,110.357 R4.2@102.132,110.233 ; R3.2@99.87,110.357 R4.2@101.931,111.297 ; R3.2@99.87,110.357 R4.2@102.096,110.777 ; R3.2@99.894,110.271 R4.2@101.911,111.29 ; R3.2@99.894,110.271 R4.2@102.096,110.777 ; R3.2@99.903,111.237 R4.2@102.096,111.137 ; R3.2@99.917,110.68 102.052,110.234 R3.2@99.917,110.681 ; R3.2@99.917,110.68 102.004,111.314 R3.2@99.917,110.681 ; R3.2@99.917,110.68 R4.2@102.096,110.777 ; R3.2@99.917,110.681 R4.2@102.096,110.777 ; R3.2@99.919,111.159 101.978,110.425 R3.2@99.922,111.158 ; R3.2@99.919,111.159 R4.2@102.096,110.957 ; R3.2@99.921,110.761 R4.2@102.096,110.957 ; R3.2@99.922,111.158 R4.2@102.096,110.957 ; R3.2@99.926,111.225 R4.2@102.096,111.137 ; R3.2@99.934,111.631 R4.2@101.91,110.625 ; R3.2@99.934,111.631 R4.2@102.096,111.137 ; R3.2@99.937,110.992 R4.2@102.096,110.957 ; R3.2@99.942,110.521 R4.2@102.096,110.777 ; R3.2@99.944,110.921 102.036,110.415 R3.2@99.948,110.922 ; R3.2@99.944,110.921 102.018,111.496 R3.2@99.948,110.922 ; R3.2@99.944,110.921 R4.2@102.096,110.957 ; R3.2@99.948,110.922 R4.2@102.096,110.957 ; R3.2@99.96,110.398 R4.2@102.096,110.777 ; R3.2@99.964,111.391 101.963,110.608 R3.2@99.97,111.391 ; R3.2@99.964,111.391 102.091,111.682 R3.2@99.97,111.391 ; R3.2@99.964,111.391 R4.2@102.096,111.137 ; R3.2@99.97,111.391 R4.2@102.096,111.137 ; R3.2@99.972,110.317 102.144,110.234 R3.2@100.01,110.32 ; R3.2@99.972,110.317 R4.2@102.096,110.777 ; R3.2@99.975,110.95 R4.2@102.096,110.957 ; R3.2@99.976,111.256 R4.2@102.096,111.137 ; R3.2@99.989,111.398 R4.2@102.096,111.137 ; R3.2@99.993,110.471 102.105,110.232 R3.2@99.992,110.472 ; R3.2@99.993,110.471 101.949,111.302 R3.2@99.992,110.472 ; R3.2@99.993,110.471 R4.2@102.096,110.777 ; R3.2@99.992,110.472 R4.2@102.096,110.777 ; R3.2@99.995,111.61 R4.2@101.91,110.625 ; R3.2@99.995,111.61 R4.2@102.096,111.137 ; R3.2@99.996,111.434 R4.2@102.096,111.137 ; R3.2@100,111.606 R4.2@101.91,110.625 ; R3.2@100,111.606 R4.2@102.096,111.137 ; R3.2@100.003,110.509 R4.2@102.096,110.777 ; R3.2@100.01,110.32 R4.2@101.912,111.29 ; R3.2@100.01,110.32 R4.2@102.096,110.777 ; R3.2@100.012,110.384 R4.2@102.096,110.777 ; R3.2@100.029,110.295 R4.2@102.096,110.777 ; R4.2@101.895,110.739 99.569,110.412 R4.2@101.946,110.742 ; P100.2@114.572,116.249 115.12,118.276 ; P100.2@114.572,116.249 115.12,118.276 ; P100.2@114.572,116.249 115.12,118.276 ; P100.2@114.572,116.249 115.12,118.276 ; P100.2@114.572,116.249 115.12,118.276 ; pad.9@114.587,120.394 115.12,118.35 ; pad.9@114.587,120.394 115.12,118.35 ; pad.9@114.587,120.394 115.12,118.35 ; pad.9@114.587,120.394 115.12,118.35 ; pad.9@114.587,120.394 115.12,118.35 ; pad.9@114.589,121.219 115.12,122.92 ; pad.9@114.589,121.219 115.12,122.92 ; pad.9@114.589,121.219 115.12,122.92 ; pad.9@114.589,121.219 115.12,122.92 ; pad.9@114.589,121.219 115.12,122.92 ; P100.2@115.092,116.176 115.12,118.276 ; P100.2@115.092,116.176 115.12,118.276 ; P100.2@115.092,116.176 115.12,118.276 ; P100.2@115.092,116.176 115.12,118.276 ; P100.2@115.092,116.176 115.12,118.276 ; 115.12,118.276 P100.2@115.614,116.235 ; 115.12,118.276 P100.2@115.614,116.235 ; 115.12,118.276 P100.2@115.614,116.235 ; 115.12,118.276 P100.2@115.614,116.235 ; 115.12,118.276 P100.2@115.614,116.235 ; 115.12,118.35 pad.9@115.653,120.394 ; 115.12,118.35 pad.9@115.12,120.462 ; 115.12,118.35 pad.9@115.653,120.394 ; 115.12,118.35 pad.9@115.12,120.462 ; 115.12,118.35 pad.9@115.653,120.394 ; 115.12,118.35 pad.9@115.12,120.462 ; 115.12,118.35 pad.9@115.653,120.394 ; 115.12,118.35 pad.9@115.12,120.462 ; 115.12,118.35 pad.9@115.653,120.394 ; 115.12,118.35 pad.9@115.12,120.462 ; pad.9@115.12,121.138 115.12,122.92 ; pad.9@115.12,121.138 115.12,122.92 ; pad.9@115.12,121.138 115.12,122.92 ; pad.9@115.12,121.138 115.12,122.92 ; pad.9@115.12,121.138 115.12,122.92 ; 115.12,122.92 pad.9@115.651,121.219 ; 115.12,122.92 pad.9@115.651,121.219 ; 115.12,122.92 pad.9@115.651,121.219 ; 115.12,122.92 pad.9@115.651,121.219 ; 115.12,122.92 pad.9@115.651,121.219 ; P3.1@129.754,111.093 130.29,112.51 ; P3.1@129.754,111.093 130.29,112.51 ; P3.1@129.754,111.093 130.29,112.51 ; P3.1@129.754,111.093 130.29,112.51 ; P3.1@129.754,111.093 130.29,112.51 ; P3.1@130.29,110.995 130.29,112.51 ; P3.1@130.29,110.995 130.29,112.51 ; P3.1@130.29,110.995 130.29,112.51 ; P3.1@130.29,110.995 130.29,112.51 ; P3.1@130.29,110.995 130.29,112.51 ; 130.29,112.51 P3.1@130.826,111.093 ; 130.29,112.51 P3.1@130.826,111.093 ; 130.29,112.51 P3.1@130.826,111.093 ; 130.29,112.51 P3.1@130.826,111.093 ; 130.29,112.51 P3.1@130.826,111.093 ; pad.1@147.161,121.156 147.5,123.255 ; pad.1@147.161,121.156 147.5,123.255 ; pad.1@147.161,121.156 147.5,123.255 ; pad.1@147.161,121.156 147.5,123.255 ; pad.1@147.165,120.394 147.697,118.35 ; pad.1@147.165,120.394 147.697,118.35 ; pad.1@147.165,120.394 147.697,118.35 ; pad.1@147.165,120.394 147.697,118.35 ; pad.1@147.165,120.394 147.697,118.35 ; 147.501,123.246 pad.1@147.697,121.138 ; 147.5,123.255 pad.1@148.222,121.255 ; 147.5,123.255 pad.1@147.697,121.138 ; 147.5,123.255 pad.1@148.222,121.255 ; 147.5,123.255 pad.1@147.697,121.138 ; 147.5,123.255 pad.1@148.222,121.255 ; 147.5,123.255 pad.1@147.697,121.138 ; 147.5,123.255 pad.1@148.222,121.255 ; 147.5,123.255 pad.1@147.697,121.138 ; P100.15@147.588,116.139 147.697,118.306 ; P100.15@147.588,116.139 147.697,118.306 ; P100.15@147.588,116.139 147.697,118.306 ; P100.15@147.588,116.139 147.697,118.306 ; P100.15@147.591,115.113 148.1,113.076 ; P100.15@147.591,115.113 148.1,113.076 ; P100.15@147.591,115.113 148.1,113.076 ; P100.15@147.591,115.113 148.1,113.076 ; P100.15@147.591,115.113 148.1,113.076 ; 147.697,118.306 P100.15@148.611,116.338 ; 147.697,118.306 P100.15@148.112,116.176 ; 147.697,118.306 P100.15@148.611,116.338 ; 147.697,118.306 P100.15@148.112,116.176 ; 147.697,118.306 P100.15@148.611,116.338 ; 147.697,118.306 P100.15@148.112,116.176 ; 147.697,118.306 P100.15@148.611,116.338 ; 147.697,118.306 P100.15@148.112,116.176 ; 147.697,118.35 pad.1@148.23,120.394 ; 147.697,118.35 pad.1@147.697,120.462 ; 147.697,118.35 pad.1@148.23,120.394 ; 147.697,118.35 pad.1@147.697,120.462 ; 147.697,118.35 pad.1@148.23,120.394 ; 147.697,118.35 pad.1@147.697,120.462 ; 147.697,118.35 pad.1@148.23,120.394 ; 147.697,118.35 pad.1@147.697,120.462 ; 147.697,118.35 pad.1@148.23,120.394 ; 147.697,118.35 pad.1@147.697,120.462 ; 147.706,118.262 P100.15@148.112,116.176 ; 148.1,113.076 P100.15@148.632,115.107 ; 148.1,113.076 P100.15@148.112,115.176 ; 148.1,113.076 P100.15@148.632,115.107 ; 148.1,113.076 P100.15@148.112,115.176 ; 148.1,113.076 P100.15@148.632,115.107 ; 148.1,113.076 P100.15@148.112,115.176 ; 148.1,113.076 P100.15@148.632,115.107 ; 148.1,113.076 P100.15@148.112,115.176 ; 148.1,113.076 P100.15@148.632,115.107 ; 148.1,113.076 P100.15@148.112,115.176 ; R20.2@153.755,93.413 154.519,95.635 ; R20.2@153.755,93.413 154.519,95.635 ; R20.2@153.755,93.413 154.519,95.635 ; R20.2@153.755,93.413 154.519,95.635 ; R20.2@153.755,93.413 154.519,95.635 ; R20.2@153.755,93.413 154.519,95.635 ; R20.1@153.759,85.513 154.576,83.409 ; R20.1@153.759,85.513 154.576,83.409 ; R20.1@153.759,85.513 154.576,83.409 ; R20.1@153.759,85.513 154.576,83.409 ; R20.1@153.759,85.513 154.576,83.409 ; R20.1@153.759,85.513 154.576,83.409 ; R20.1@153.759,85.513 154.576,83.409 ; R20.2@153.931,93.789 155.951,95.551 ; R20.2@153.931,93.789 155.951,95.551 ; R20.2@153.93,93.789 155.941,95.542 ; R20.2@154.195,93.307 154.519,95.635 ; R20.2@154.195,93.307 154.519,95.635 ; R20.2@154.195,93.307 154.519,95.635 ; R20.2@154.195,93.307 154.519,95.635 ; R20.2@154.195,93.307 154.519,95.635 ; R20.2@154.195,93.307 154.519,95.635 ; R20.1@154.196,85.633 154.576,83.409 ; R20.1@154.196,85.633 154.576,83.409 ; R20.1@154.196,85.633 154.576,83.409 ; R20.1@154.196,85.633 154.576,83.409 ; R20.1@154.196,85.633 154.576,83.409 ; R20.1@154.196,85.633 154.576,83.409 ; R20.1@154.196,85.633 154.576,83.409 ; R20.2@154.255,93.475 155.951,95.551 ; R20.2@154.255,93.475 155.951,95.551 ; R20.2@154.255,93.475 155.941,95.542 ; R20.1@154.519,85.665 154.576,83.409 ; R20.1@154.519,85.665 154.576,83.409 ; R20.1@154.519,85.665 154.576,83.409 ; R20.1@154.519,85.665 154.576,83.409 ; R20.1@154.519,85.665 154.576,83.409 ; R20.1@154.519,85.665 154.576,83.409 ; R20.2@154.519,93.285 154.519,94.119 156.1,95.7 ; R20.2@154.519,93.285 155.951,95.551 ; R20.2@154.519,93.285 154.519,95.635 ; R20.2@154.519,93.285 154.519,95.635 ; R20.2@154.519,93.285 154.519,95.635 ; R20.2@154.519,93.285 155.951,95.551 ; R20.2@154.519,93.285 154.519,95.635 ; R20.2@154.519,93.285 155.941,95.542 ; R20.2@154.519,93.285 155.947,95.538 ; R20.2@154.519,93.285 155.873,95.456 ; R20.2@154.519,93.285 155.898,95.44 ; 154.519,95.635 R20.2@155.283,93.413 ; 154.519,95.635 R20.2@154.843,93.307 ; 154.519,95.635 R20.2@155.283,93.413 ; 154.519,95.635 R20.2@154.843,93.307 ; 154.519,95.635 R20.2@155.283,93.413 ; 154.519,95.635 R20.2@154.843,93.307 ; 154.519,95.635 R20.2@155.283,93.413 ; 154.519,95.635 R20.2@154.843,93.307 ; 154.519,95.635 R20.2@155.283,93.413 ; 154.519,95.635 R20.2@154.843,93.307 ; 154.519,95.635 R20.2@155.283,93.413 ; 154.519,95.635 R20.2@154.843,93.307 ; 154.576,83.409 R20.1@155.286,85.551 ; 154.576,83.409 R20.1@154.844,85.65 ; 154.576,83.409 R20.1@155.286,85.551 ; 154.576,83.409 R20.1@154.844,85.65 ; 154.576,83.409 R20.1@155.286,85.551 ; 154.576,83.409 R20.1@154.844,85.65 ; 154.576,83.409 R20.1@155.286,85.551 ; 154.576,83.409 R20.1@154.844,85.65 ; 154.576,83.409 R20.1@155.286,85.551 ; 154.576,83.409 R20.1@154.844,85.65 ; 154.576,83.409 R20.1@155.286,85.551 ; 154.576,83.409 R20.1@154.844,85.65 ; 154.576,83.409 R20.1@155.286,85.551 ; 154.576,83.409 R20.1@154.844,85.65 ; R20.2@154.804,93.128 155.951,95.551 ; R20.2@154.804,93.128 155.951,95.551 ; R20.2@154.804,93.128 155.947,95.538 ; R20.2@155.227,92.97 155.951,95.551 ; R20.2@155.227,92.97 155.951,95.551 ; R20.2@155.227,92.971 155.898,95.44 ; 155.872,95.426 154.256,93.476 155.947,95.538 ; 155.872,95.426 154.804,93.129 155.941,95.542 ; 156.605,95.7 R1.2@158.689,95.271 ; 156.605,95.7 R1.2@158.63,96.351 ; 156.605,95.7 R1.2@158.729,95.815 ; 156.605,95.7 R1.2@158.689,95.271 ; 156.605,95.7 R1.2@158.63,96.351 ; 156.605,95.7 R1.2@158.729,95.815 ; 156.605,95.7 R1.2@158.689,95.271 ; 156.605,95.7 R1.2@158.63,96.351 ; 156.605,95.7 R1.2@158.729,95.815 ; 156.605,95.7 R1.2@158.689,95.271 ; 156.605,95.7 R1.2@158.63,96.351 ; 156.605,95.7 R1.2@158.729,95.815 ; C1.2@157.128,121.172 157.5,123.28 ; C1.2@157.128,121.172 157.5,123.28 ; C1.2@157.128,121.172 157.5,123.28 ; C1.2@157.128,121.172 157.5,123.28 ; 157.5,123.28 C1.2@158.205,121.259 ; 157.5,123.28 C1.2@157.672,121.146 ; 157.5,123.28 C1.2@158.205,121.259 ; 157.5,123.28 C1.2@157.672,121.146 ; 157.5,123.28 C1.2@158.205,121.259 ; 157.5,123.28 C1.2@157.672,121.146 ; 157.5,123.28 C1.2@158.205,121.259 ; 157.5,123.28 C1.2@157.672,121.146 ; 158.848,54.891 U2.3@161.014,53.871 ; 158.848,54.891 U2.3@161.182,55.422 ; 158.848,54.891 U2.3@161.167,54.296 ; 158.848,54.891 U2.3@161.241,54.973 ; 158.848,54.891 U2.3@161.228,54.632 ; 158.848,54.891 U2.3@161.014,53.871 ; 158.848,54.891 U2.3@161.182,55.422 ; 158.848,54.891 U2.3@161.167,54.296 ; 158.848,54.891 U2.3@161.241,54.973 ; 158.848,54.891 U2.3@161.228,54.632 ; 158.848,54.891 U2.3@161.014,53.871 ; 158.848,54.891 U2.3@161.182,55.422 ; 158.848,54.891 U2.3@161.167,54.296 ; 158.848,54.891 U2.3@161.241,54.973 ; 158.848,54.891 U2.3@161.228,54.632 ; 158.848,54.891 U2.3@161.014,53.871 ; 158.848,54.891 U2.3@161.182,55.422 ; 158.848,54.891 U2.3@161.167,54.296 ; 158.848,54.891 U2.3@161.241,54.973 ; 158.848,54.891 U2.3@161.228,54.632 ; 158.848,54.891 U2.3@161.014,53.871 ; 158.848,54.891 U2.3@161.182,55.422 ; 158.848,54.891 U2.3@161.167,54.296 ; 158.848,54.891 U2.3@161.241,54.973 ; 158.848,54.891 U2.3@161.228,54.632 ; 158.848,54.891 U2.3@161.014,53.871 ; 158.848,54.891 U2.3@161.182,55.422 ; 158.848,54.891 U2.3@161.167,54.296 ; 158.848,54.891 U2.3@161.241,54.973 ; 158.848,54.891 U2.3@161.228,54.632 ; 158.87,54.889 U2.3@161.013,53.871 ; 158.87,54.889 U2.3@161.167,54.297 ; 158.87,54.889 U2.3@161.24,54.973 ; 159.682,72.518 C6.1@161.228,69.956 ; 159.871,72.105 162.255,70.211 160.001,71.989 ; 159.871,72.105 C6.1@162.028,69.956 ; 160.001,71.989 C6.1@162.028,69.956 ; 160.123,71.947 C6.1@162.028,69.956 ; 160.21,72.013 C6.1@162.028,69.956 ; U2.3@160.448,55.018 161.228,57.252 ; U2.3@160.448,55.018 161.228,57.252 ; U2.3@160.448,55.018 161.228,57.252 ; U2.3@160.448,55.018 161.228,57.252 ; U2.3@160.448,55.018 161.228,57.252 ; U2.3@160.448,55.018 161.228,57.252 ; U2.3@160.448,55.018 161.228,57.252 ; U2.3@160.454,54.214 161.228,52.472 ; U2.3@160.454,54.214 161.228,52.472 ; U2.3@160.454,54.214 161.228,52.472 ; U2.3@160.454,54.214 161.228,52.472 ; U2.3@160.454,54.214 161.228,52.472 ; U2.3@160.454,54.214 161.228,52.472 ; U2.3@160.454,54.214 161.228,52.472 ; U2.3@160.888,54.911 161.228,57.252 ; U2.3@160.888,54.911 161.228,57.252 ; U2.3@160.888,54.911 161.228,57.252 ; U2.3@160.888,54.911 161.228,57.252 ; U2.3@160.888,54.911 161.228,57.252 ; U2.3@160.888,54.911 161.228,57.252 ; U2.3@160.888,54.911 161.228,57.252 ; 160.888,69.931 161.228,67.59 ; 160.888,69.931 C6.1@162.028,69.956 ; U2.3@160.888,54.347 161.228,52.472 ; U2.3@160.888,54.347 161.228,52.472 ; U2.3@160.888,54.347 161.228,52.472 ; U2.3@160.888,54.347 161.228,52.472 ; U2.3@160.888,54.347 161.228,52.472 ; U2.3@160.888,54.347 161.228,52.472 ; U2.3@160.888,54.347 161.228,52.472 ; 161.228,52.472 U2.3@161.228,54.632 ; 161.228,52.472 U2.3@162.002,54.214 ; 161.228,52.472 U2.3@161.568,54.347 ; 161.228,52.472 U2.3@161.228,54.378 ; 161.228,52.472 U2.3@162.002,54.214 ; 161.228,52.472 U2.3@161.568,54.347 ; 161.228,52.472 U2.3@161.228,54.378 ; 161.228,52.472 U2.3@162.002,54.214 ; 161.228,52.472 U2.3@161.568,54.347 ; 161.228,52.472 U2.3@161.228,54.378 ; 161.228,52.472 U2.3@162.002,54.214 ; 161.228,52.472 U2.3@161.568,54.347 ; 161.228,52.472 U2.3@161.228,54.378 ; 161.228,52.472 U2.3@162.002,54.214 ; 161.228,52.472 U2.3@161.568,54.347 ; 161.228,52.472 U2.3@161.228,54.378 ; 161.228,52.472 U2.3@162.002,54.214 ; 161.228,52.472 U2.3@161.568,54.347 ; 161.228,52.472 U2.3@161.228,54.378 ; 161.228,52.472 U2.3@162.002,54.214 ; 161.228,52.472 U2.3@161.568,54.347 ; 161.228,52.472 U2.3@161.228,54.378 ; U2.3@161.228,54.886 161.228,57.252 ; U2.3@161.228,54.886 161.228,57.252 ; U2.3@161.228,54.886 161.228,57.252 ; U2.3@161.228,54.886 161.228,57.252 ; U2.3@161.228,54.886 161.228,57.252 ; U2.3@161.228,54.886 161.228,57.252 ; U2.3@161.228,54.886 161.228,57.252 ; 161.228,57.252 U2.3@162.008,55.018 ; 161.228,57.252 U2.3@161.568,54.911 ; 161.228,57.252 U2.3@162.008,55.018 ; 161.228,57.252 U2.3@161.568,54.911 ; 161.228,57.252 U2.3@162.008,55.018 ; 161.228,57.252 U2.3@161.568,54.911 ; 161.228,57.252 U2.3@162.008,55.018 ; 161.228,57.252 U2.3@161.568,54.911 ; 161.228,57.252 U2.3@162.008,55.018 ; 161.228,57.252 U2.3@161.568,54.911 ; 161.228,57.252 U2.3@162.008,55.018 ; 161.228,57.252 U2.3@161.568,54.911 ; 161.228,57.252 U2.3@162.008,55.018 ; 161.228,57.252 U2.3@161.568,54.911 ; 161.228,67.345 C6.1@162.028,69.956 ; 161.228,67.59 161.248,70.088 161.231,67.608 ; 161.228,67.59 C6.1@162.343,69.825 ; 161.228,67.59 C6.1@162.028,69.956 ; 161.231,67.608 C6.1@162.343,69.824 ; 161.231,67.608 C6.1@162.028,69.956 ; 161.253,67.661 C6.1@162.343,69.824 ; 161.253,67.661 C6.1@162.028,69.956